# EAGLE board board-v1 (EAGLE 9.6.2)
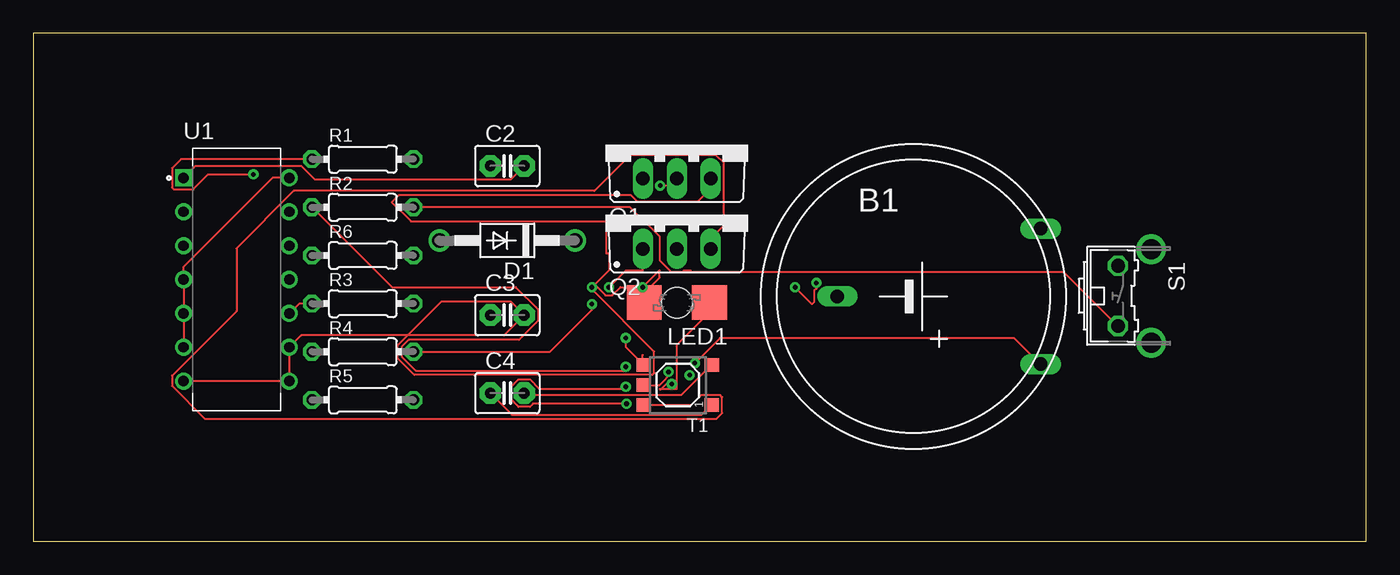
[diagram p0: board, top side]
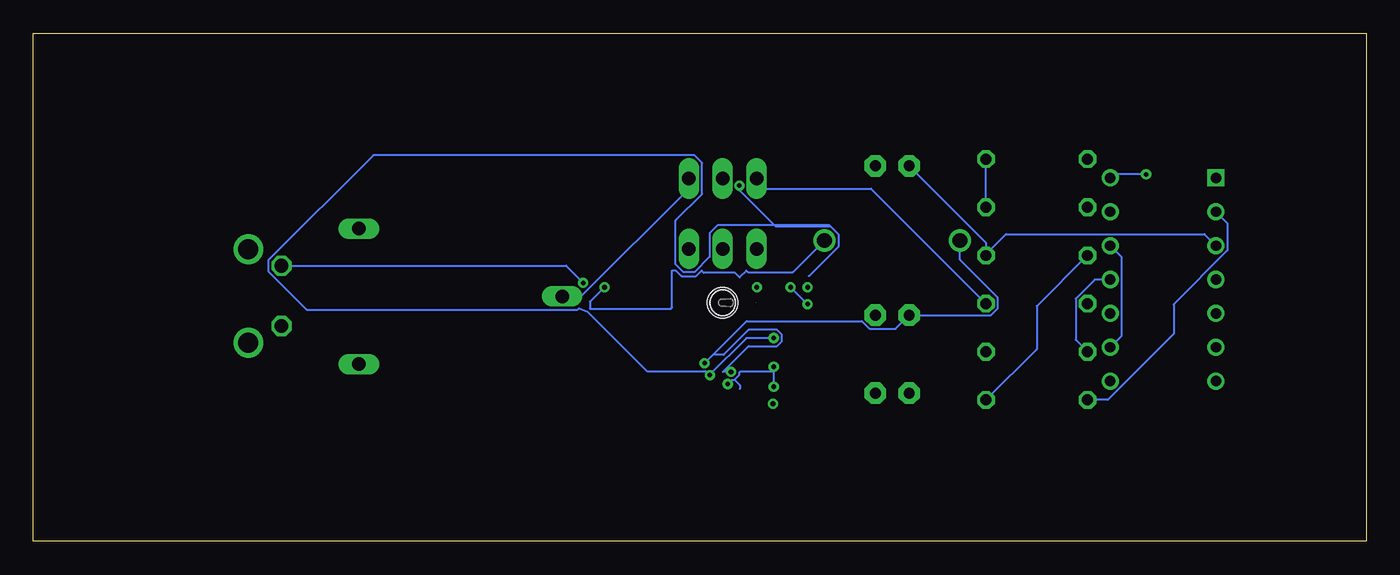
[diagram p1: board, bottom side, seen from below]

Size 100 x 38.09 mm. Coordinates in mm from the lower left corner, seen from the top.
Outline: 0,0 100,0 100,38.09 0,38.09 0,0
Copper layers (1*16): Top 0.035mm / dielectric 1.5mm / Bottom 0.035mm
Design rules "default": minimum track width 6mil, minimum drill 0.35mm, track to track 6mil, track to pad 6mil, pad to pad 6mil, via to via 6mil, smd to smd 6mil, copper to edge 40mil, drill to drill 6mil, minimum pad ring 10mil, minimum via ring 8mil, stop-mask expansion 4mil, vias tented up to drill 0mil, thermal gap 10mil

## Footprints (pad centres in the part's own frame; a part is rotated, then mirrored left to right if it is on the bottom)
BATTERY = drill 1.016 long: + 9.525,-5.08; +@1 9.525,5.08; - -5.715,0
C2.5-3 = drill 0.813 pad 1.6 octagon: 1 -1.27,0; 2 1.27,0
DO41-10 = drill 1.118: A 5.08,0; C -5.08,0
P47F-BOTTOM = smd 2.6 x 2.6: A -2.45,0; C 2.45,0 | hole 2.3: 0,0
TO220BV = drill 1.016 long: D 0,-2.54; G -2.54,-2.54; S 2.54,-2.54
0204/7 = drill 0.813 octagon: 1 -3.81,0; 2 3.81,0
B3F-31XX = drill 1.016 octagon: 1 -2.261,-1.245; 2 2.261,-1.245 | drill 1.499 pad 2.159: 3 -3.505,1.245; 4 3.505,1.245
MS40 = smd 1 x 1.1: 1 -1.5,-2.55; 2 -1.5,2.55; 3 0,2.55; 4 1.5,2.55; 5 1.5,-2.55
DIP794W45P254L1969H508Q14 = drill 0.77 pad 1.17 square: 1 -3.97,7.62 | drill 0.77 pad 1.17: 2 -3.97,5.08; 3 -3.97,2.54; 4 -3.97,0; 5 -3.97,-2.54; 6 -3.97,-5.08; 7 -3.97,-7.62; 8 3.97,-7.62; 9 3.97,-5.08; 10 3.97,-2.54; 11 3.97,0; 12 3.97,2.54; 13 3.97,5.08; 14 3.97,7.62

## Placement (x,y rotation side)
B1  12V  [BATTERY]  66.04,18.36 0 top
C2  0.1uF  [C2.5-3]  35.56,28.15 0 top
C3  220uF/25V  [C2.5-3]  35.56,16.96 0 top
C4  0.1uF  [C2.5-3]  35.56,11.11 0 top
D1  1N4004  [DO41-10]  35.56,22.55 180 top
LED1  LAP4-BOTTOM  [P47F-BOTTOM]  48.28,17.89 180 top
Q1  IRF540  [TO220BV]  48.28,29.75 0 top
Q2  IRF540  [TO220BV]  48.28,24.47 0 top
R1  330 Ω  [0204/7]  24.72,28.65 0 top
R2  1k Ω  [0204/7]  24.72,25.04 0 top
R3  220 Ω  [0204/7]  24.72,17.82 0 top
R4  220 Ω  [0204/7]  24.72,14.21 0 top
R5  1K Ω  [0204/7]  24.72,10.6 0 top
R6  390K Ω  [0204/7]  24.72,21.43 0 top
S1  [B3F-31XX]  82.62,18.4 270 top
T1  MS40B  [MS40]  48.35,11.71 90 top
U1  CD4047BE  [DIP794W45P254L1969H508Q14]  15.24,19.63 0 top

## Library data of the parts
B1 = special
C2-C4 = capacitor-wima
D1 = diode
LED1 = led
Q1 Q2 = transistor-power
R1-R6 = rcl; SPICEPREFIX: R
S1 = switch-omron; MPN: B3F-3100; OC_FARNELL: 959704; OC_NEWARK: 36M3582
T1 = inductor-neosid; OC_FARNELL: unknown; OC_NEWARK: unknown
U1 = CD4047BE; AVAILABILITY: In Stock; CHECK_PRICES: https://www.snapeda.com/parts/CD4047BE/Texas+Instruments/view-part/?ref=eda; DESCRIPTION: CMOS Low-Power Monostable/Astable Multivibrator; MF: Texas Instruments; MP: CD4047BE; PACKAGE: PDIP-14 Texas Instruments; PRICE: None; PURCHASE-URL: https://www.snapeda.com/api/url_track_click_mouser/?unipart_id=105099&manufacturer=Texas Instruments&part_name=CD4047BE&search_term=None; SNAPEDA_LINK: https://www.snapeda.com/parts/CD4047BE/Texas+Instruments/view-part/?ref=snap

## Nets
0: B1.- C3.2 LED1.C Q1.S U1.7 U1.8 U1.9 U1.12
+: B1.+@1
N$1: C2.2 U1.1
N$2: C2.1 R6.2 U1.3
N$3: C4.1 T1.1
N$4: C4.2 T1.5
N$5: Q2.S T1.2
N$6: Q1.D T1.4
N$7: B1.+ C3.1 D1.A T1.3
N$8: R5.1 U1.2
N$9: R1.1 U1.4 U1.5 U1.6 U1.14
N$10: R1.2 R2.2 S1.2
N$11: LED1.A R2.1
N$12: D1.C S1.1
N$13: Q1.G R3.2
N$14: Q2.G R4.2
N$15: R3.1 U1.10
N$16: R4.1 U1.11
N$17: R5.2 R6.1

## Tracks (layer width: path | path; a pad name or v marks a point on that pad's centre or on a via)
0  (via drill 0.35)
  Top 0.152: U1.7 U1.8 U1.9 20.09,15.43 35.3,15.43 C3.2 35.8,17.99 30.61,17.99 27.33,14.71 27.33,13.72 28.57,12.48 46.45,12.48 46.58,12.61 46.58,14.22 41.91,18.89 v41.91,19.05 | Q1.S 50.82,26.45 49.83,25.45 45.33,25.45 44.85,25.93 27.41,25.93 26.9,25.42 28.33,23.98 42.97,23.98 42.97,21.59 43.18,21.59 43.18,20.32 v41.91,19.05 | v41.91,19.05 42.32,19.05 42.93,18.44 43.43,18.44 44.04,19.05 v45.72,19.05 46.99,20.32 46.99,19.78 46.03,18.82 46.03,18.1 LED1.C
  Bottom 0.152: U1.9 18.34,15.42 18.34,21.3 U1.12 | Q1.S 50.82,26.45 58.9,18.36 B1.-
N$1
  Top 0.152: C2.2 35.8,27.12 21.14,27.12 20.14,28.12 12.14,28.12 U1.1
N$2
  Bottom 0.152: 28.53,21.53 R6.2 | R6.2 28.53,21.53 | 28.53,21.53 27.03,23.03 12.14,23.03 U1.3 | C2.1 28.53,22.38 R6.2
N$3
  Top 0.152: C4.1 35.92,9.48 50.12,9.48 50.85,10.21 T1.1
N$4
  Top 0.152: C4.2 36.96,10.98 48.62,10.98 50.85,13.21 T1.5
N$5
  Top 0.152: Q2.S 50.82,22.69 51.81,23.68 51.81,28.38 51.23,28.96 44.79,28.96 42.09,26.27 19.54,26.27 15.24,21.96 15.24,17.25 10.4,12.41 10.4,11.65 12.88,9.18 51.24,9.18 51.68,9.61 51.68,10.8 51.55,10.94 50.08,10.94 49.35,10.21 T1.2
N$6  (via drill 0.35)
  Top 0.152: 48.33,27.11 Q1.D 47.74,26.67 v47.03,26.67 46.99,26.67 | 45.72,13.97 45.72,13.29 T1.4 44.45,14.56 v44.45,15.24
  Bottom 0.152: v47.03,26.67 46.99,26.63 46.99,26.3 44.31,23.62 40.2,23.62 | 40.2,23.62 39.57,22.99 39.57,22.11 41.81,19.87 | 40.2,23.62 40.26,23.68 48.69,23.68 49.27,23.1 49.27,21.32 50.41,20.18 51.23,20.18 51.81,20.76 51.81,24.05 49.83,26.03 49.83,28.38 50.41,28.96 74.47,28.96 82.36,21.07 82.36,20.25 79.48,17.37 59.15,17.37 59.05,17.47 58.41,17.2 53.97,12.75 49.58,12.75 49.29,12.46 | 49.29,12.46 v49.25,12.46 | v44.45,15.24 46.51,15.24 49.29,12.46
N$7  (via drill 0.35)
  Top 0.152: B1.+ 73.6,15.24 51.51,15.24 v49.63,13.36 | T1.3 46.96,11.71 47.95,12.7 v47.65,12.7
  Bottom 0.152: D1.A 30.48,21.11 27.64,18.27 27.64,17.45 28.16,16.93 34.27,16.93 C3.1 35.32,15.93 37.26,15.93 37.84,16.51 46.48,16.51 v49.63,13.36 | 49.53,13.36 v49.63,13.36 | v47.65,12.7 48.26,12.7 46.33,14.63 44.2,14.63 43.84,14.99 43.84,15.49 44.2,15.85 46.34,15.85 48.21,13.97 49.02,13.97 v49.63,13.36
N$8
  Bottom 0.152: U1.2 10.4,23.84 10.4,21.81 14.44,17.77 14.44,15.55 19.39,10.6 R5.1
N$9  (via drill 0.35)
  Top 0.152: U1.14 17.94,27.25 11.27,20.58 U1.4 U1.5 U1.6 | v16.51,27.51 13.13,27.51 12,26.38 10.54,26.38 10.4,26.51 10.4,27.98 11.08,28.66 R1.1
  Bottom 0.152: v16.51,27.51 18.95,27.51 U1.14
N$10
  Top 0.152: 28.48,25.15 R2.2 44.78,25.04 47.01,22.82 47.01,21.04 47.87,20.18 48.69,20.18 48.8,20.29 49.32,20.29 49.43,20.18 77.34,20.18 S1.2
  Bottom 0.152: 28.63,24.99 R2.2 R1.2
N$11  (via drill 0.35)
  Top 0.152: v44.5,10.31 37.49,10.31 37.26,10.08 36.4,10.08 35.8,10.68 35.8,11.53 36.4,12.14 37.26,12.14 37.96,11.43 44.45,11.43 v44.45,11.59 | R2.1 26.9,19.05 36.19,19.05 37.86,17.38 37.86,16.53 36.43,15.1 28.16,15.1 27.64,14.58 27.64,13.84 28.7,12.79 44.45,12.79 v44.45,13.09 | LED1.A 50.52,17.68 50.52,16.96 48.26,14.7 48.26,11.43 47.12,11.43 | 47.12,11.43 47.09,11.4 46.99,11.4 | 47.12,11.43 47.48,11.79 v47.9,11.79
  Bottom 0.152: R2.1 20.7,24.84 | v44.45,11.59 44.45,12.7 | 44.45,12.7 46.99,12.7 47.05,12.64 47.05,12.45 47.4,12.09 | 47.4,12.09 47.6,12.09 v47.9,11.79 | v44.45,13.09 44.45,12.7 | 47.4,12.09 46.99,11.68 46.99,11.43
N$12  (via drill 0.35)
  Top 0.152: v58.74,19.37 58.74,18.94 58.57,18.77 58.57,17.93 58.42,17.78 v57.15,19.05
  Bottom 0.152: D1.C 43.02,20.18 46.4,20.18 46.51,20.29 47,19.79 47.35,20.13 49.71,20.13 49.87,20.29 50.28,19.87 51.35,19.87 51.8,20.32 52.07,20.32 52.07,17.53 52.15,17.45 58.24,17.45 58.24,17.96 v57.15,19.05 | 58.53,19.16 v58.74,19.37 60.03,20.66 S1.1
N$13
  Top 0.152: 45.74,27.11 Q1.G
  Bottom 0.152: Q1.G 45.74,26.45 37.15,26.45 R3.2
N$14  (via drill 0.35)
  Top 0.152: Q2.G 45.74,21.59 45.74,21.17 45.74,20.34 45.72,20.32 44.45,20.32 v43.18,19.05 | R4.2 38.78,14.21 41.91,17.34 v41.91,17.78
  Bottom 0.152: 28.58,14.16 R4.2 | v41.91,17.78 v43.18,19.05
N$15
  Top 0.152: R3.1 19.94,17.82 U1.10
N$16
  Bottom 0.152: U1.11 20.36,19.63 21.8,18.19 21.8,15.1 R4.1
N$17
  Bottom 0.152: R6.1 24.72,17.62 24.72,14.41 R5.2